# Altium PCB Airbrake Motor Controller.PcbDoc (part 2 of 2)
Units mil, origin at the board's own origin, x right, y up, seen from the top; angles counter-clockwise.
Board outline 2250 x 2250 mil, 4 copper layers (Top Layer, Layer 1, Layer 2, Bottom Layer), stack 23.756 mil thick; 103 components, 85 nets, 338 pads, 160 vias.
Unrouted connection lines stored in the file: 19.
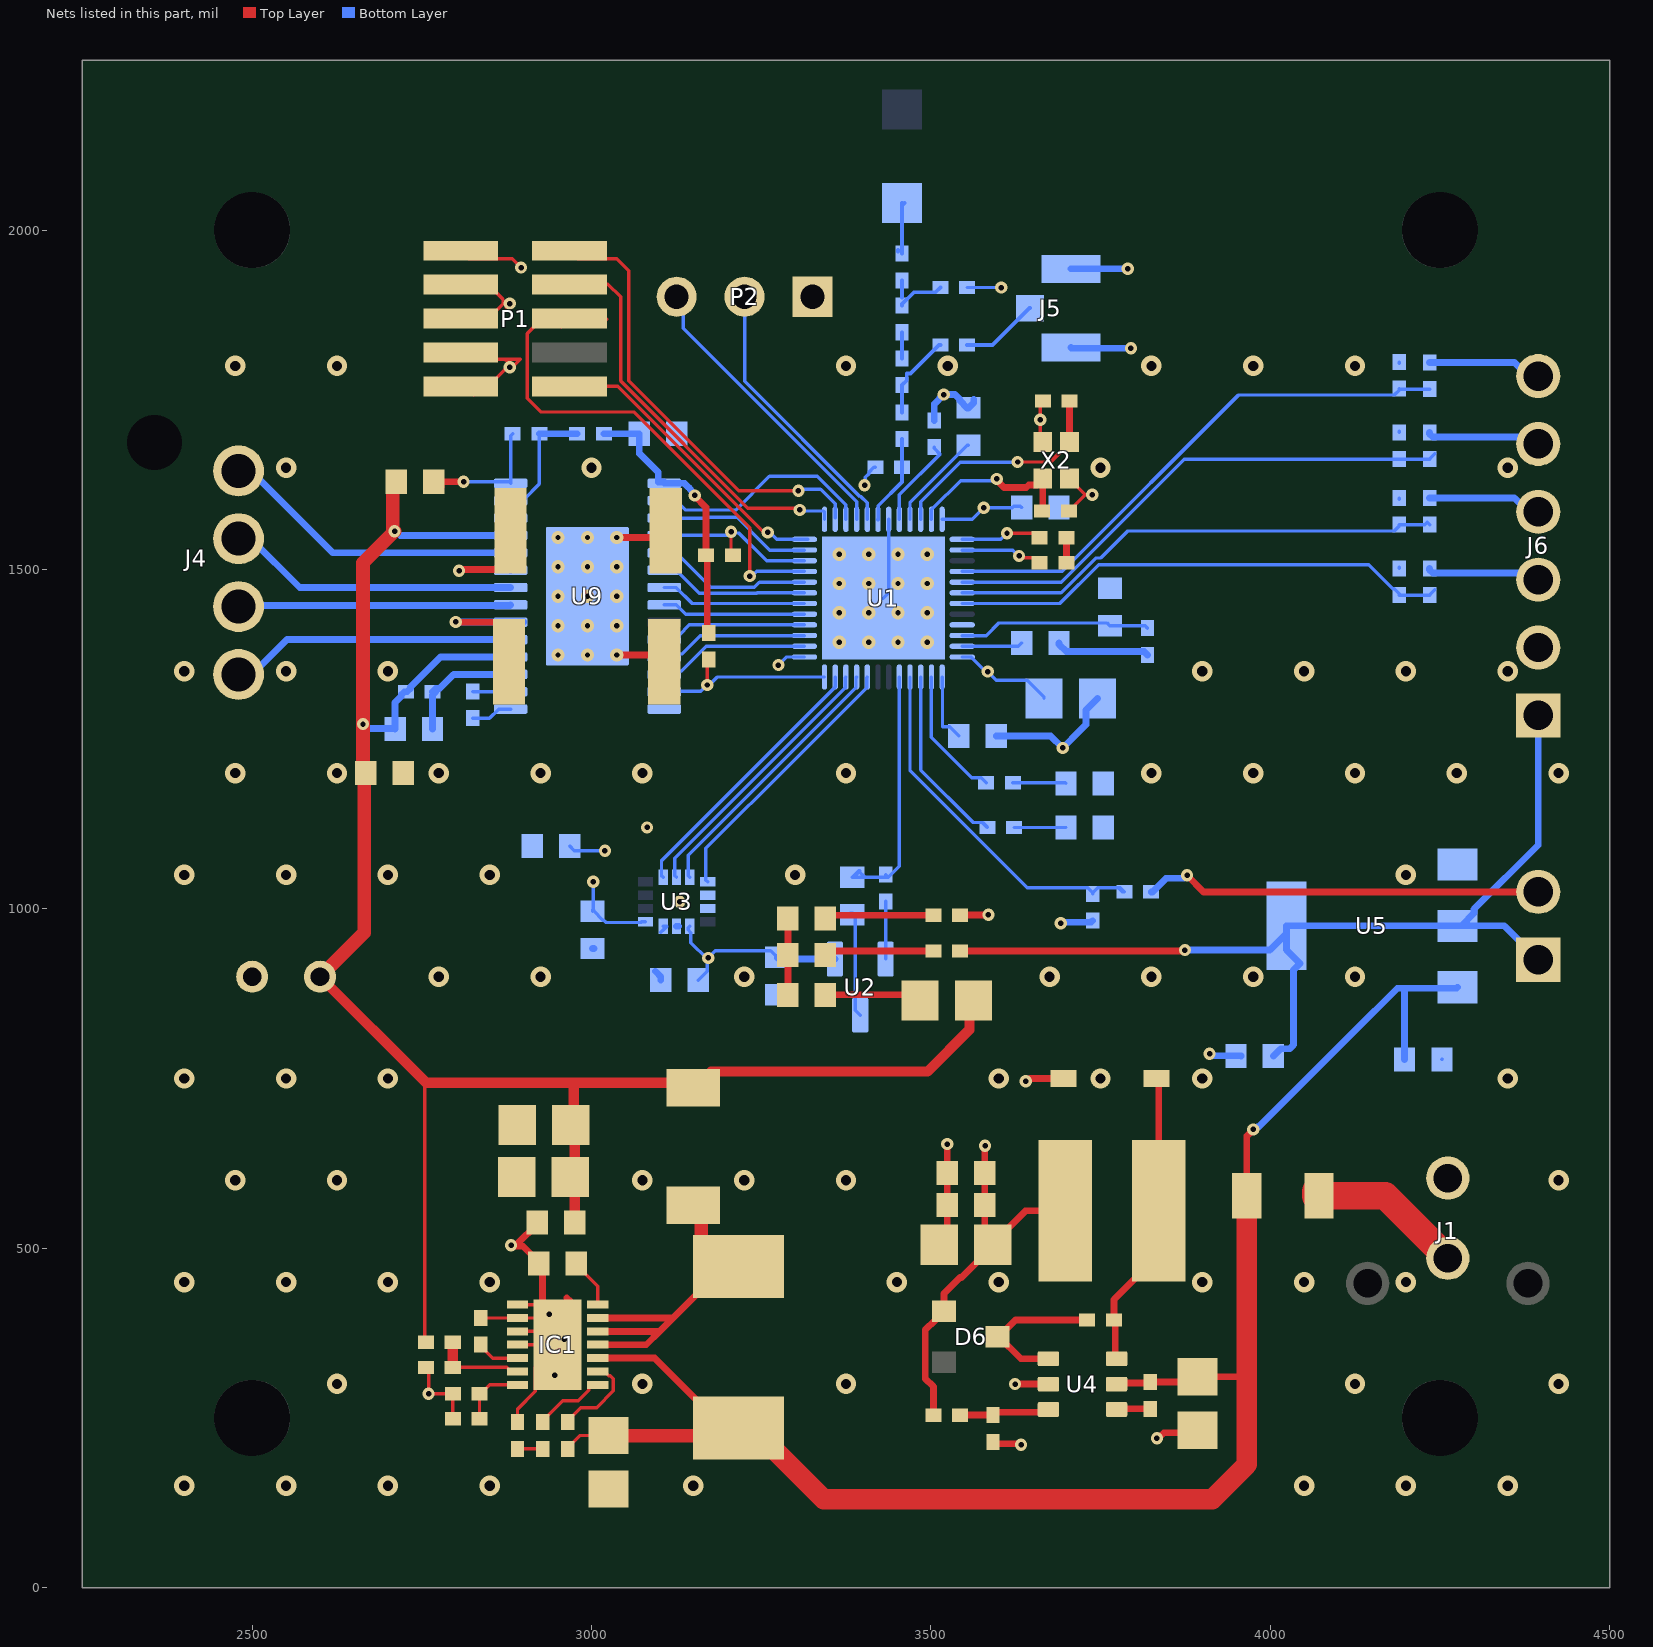
[diagram p4: the nets of this part, all layers, seen from the top]

## Part data
C1 C2 C3 C4 C5 C8 C9 C10 C11 C12 C13 C14 C15 C16 C17 C18 C19 C20 C21 C22 C23 C24 C25 C26 C27 C28 C29 C30 C31 C32 C33 C38 C39 C40 C41 C44 C45: "Capacitor", Publisher="Altium Limited"
  C1 C2 C3 C4 C5 C8 C9 C10 C11 C12 C13 C14 C15 C16 C17 C18 C19 C20 C21 C22 C23 C24 C25 C26 C27 C28 C29 C30 C31 C32 C33 C38 C39 C41 C44 C45: LatestRevisionDate=17-Jul-2002, LatestRevisionNote="Re-released for DXP Platform.", PackageDescription="Radial Cap, Thru-Hole; 2 Leads; 0.3 in Pin Spacing", PackageReference=RAD-0.3, Published=8-Jun-2000
  C40: PackageDescription="Capacitor; 2 Leads", PackageReference=CAPR5-4X5, Published=23-Sep-2002
D1: library part CMP-2000-07170-1, "Schottky Rectifier, 0.5 A, 40 V, 2-Pin SOP (SOD-123), RoHS, Tape and Reel", Diode Case Style=SOD-123, Forward Current If(AV)=500mA, Forward Surge Current Ifsm Max=5.5A, Forward Voltage VF Max=500mV, Manufacturer=STMicroelectronics, Operating Temperature Max=150°C, Package Description="2-Pin Small Outline Diode, Body 2.7 x 1.55 mm", Package Reference=SOD-123-2, Repetitive Reverse Voltage Vrrm Max=40V, Datasheet URL=http://www.st.com/content/ccc/resource/technical/document/datasheet/group1/0f/03/9b/7c/50/58/48/d7/CD00001852/files/CD00001852.pdf/jcr:content/translations/en.CD00001852.pdf, Datasheet Version=01/2002, Diode Configuration=Single, Diode Type=Schottky, Manufacturer URL=http://www.st.com/, Mounting Technology=SurfaceMount, No. of Pins=2Pins, Packaging=CutTape, Product Range=-, SVHC=NoSVHC(15-Jun-2015)
D3: library part CMP-08971-000008-1, "DIODE SCHOTTKY 20V 5A PMDTM", Forward Current=5A, Manufacturer=Rohm, Max Junction Temp=+125°C, Max Repetitive Reverse Voltage=25V, Max Surge Forward Current=100A, Package=PMDTM, Peak Reverse Current=500uA, Reverse Voltage=20V, Temperature="to +125°C", Automotive=No, Category=Diode, ComponentLink2Description=Datasheet, ComponentLink2URL=https://fscdn.rohm.com/en/products/databook/datasheet/discrete/diode/schottky_barrier/rsx501lam20tr-e.pdf, Device Class L1="Discrete Semiconductors", Device Class L2=Diodes, Device Class L3="Schottky Diodes", Digikey Description="DIODE SCHOTTKY 20V 5A PMDTM", Height=1.05mm, Lead Free=Yes, Manufacturer Part Number=RSX501LAM20TR, Octopart=https://octopart.com/rsx501lam20tr-rohm-82270774, RoHS=TRUE, Temperature Range High=+125°C
D6: library part CMP-0303-00002-2, "DIODE SCHOTTKY 30V 200MA SOT23-3", Capacitance=10pF, Forward Current=200mA, Manufacturer="Diodes Inc.", Max Junction Temp=+150°C, Max Repetitive Reverse Voltage=30V, Max Surge Forward Current=600mA, Package=SOT23, Peak Reverse Current=2uA, Temperature="-65°C to +150°C", Temperature Range Low=-65°C, Automotive=No, Automotive Grade=NA, Category=Diode, ComponentLink2Description=Datasheet, ComponentLink2URL=https://www.diodes.com/assets/Datasheets/ds11005.pdf, Device Class L1="Discrete Semiconductors", Device Class L2=Diodes, Device Class L3="Schottky Diodes", Digikey Description="DIODE SCHOTTKY 30V 200MA SOT23-3", Footprint Url=https://www.diodes.com/assets/Package-Files/SOT23.pdf, Height=1.1mm, Lead Free=Yes, Manufacturer Part Number=BAT54-7-F, Mouser Description="Switching diode SOT-23 30 V 200 mA", Octopart=https://octopart.com/bat54-7-f-diodes+inc.-39681803, Reverse Voltage=30V, RoHS=TRUE, Standoff Height=0.013mm, Temperature Range High=+150°C
E1: "Generic Antenna", LatestRevisionDate=17-Jul-2002, LatestRevisionNote="Re-released for DXP Platform.", PackageReference=PIN1, Published=24-Mar-1999, Publisher="Altium Limited"
F1: "Fuse", LatestRevisionDate=17-Jul-2002, LatestRevisionNote="Re-released for DXP Platform.", PackageDescription="Thru-Hole; 2 Leads", PackageReference=PIN-W2/E2.8, Published=8-Jun-2000, Publisher="Altium Limited"
IC1: "Integrated Circuit", Manufacturer_Name="Monolithic Power Systems (MPS)", Mouser Part Number=946-MP3426DL-LF-Z, Datasheet Link=https://www.monolithicpower.com/en/documentview/productdocument/index/version/2/document_type/Datasheet/lang/en/sku/MP3426/, Height=1mm, Manufacturer_Part_Number=MP3426DL-LF-Z, Mouser Price/Stock=https://www.mouser.co.uk/ProductDetail/Monolithic-Power-Systems-MPS/MP3426DL-LF-Z?qs=Z3CaLxJiOJL0MxCuEKYvhQ%3D%3D
J1: "Connector", Manufacturer_Name=Molex, Arrow Part Number=0430450212, Arrow Price/Stock=https://www.arrow.com/en/products/0430450212/molex, Datasheet Link=http://www.molex.com/pdm_docs/sd/430450212_sd.pdf, Manufacturer_Part_Number=0430450212
J2 J6: "Connector", Manufacturer_Name=Molex, Mouser Part Number=N/A, Height=6.99mm
  J2: Arrow Part Number=0705530036, Arrow Price/Stock=https://www.arrow.com/en/products/0705530036/molex, Datasheet Link=https://www.molex.com/pdm_docs/sd/705530036_sd.pdf, Manufacturer_Part_Number=0705530036, Mouser Price/Stock=https://www.mouser.com/Search/Refine.aspx?Keyword=N%2FA
  J6: Arrow Part Number=0705530005, Arrow Price/Stock=https://www.arrow.com/en/products/0705530005/molex, Datasheet Link=https://www.molex.com/pdm_docs/sd/705530005_sd.pdf, Manufacturer_Part_Number=0705530005, Mouser Price/Stock=https://www.mouser.co.uk/ProductDetail/Molex/0705530005?qs=PBcRNPEHKsq8dLeRN2VY7Q%3D%3D
J4: "Connector", Manufacturer_Name="TE Connectivity", Mouser Part Number=571-2-644486-4, Arrow Part Number=2-644486-4, Arrow Price/Stock=https://www.arrow.com/en/products/2-644486-4/te-connectivity, Datasheet Link=http://www.te.com/commerce/DocumentDelivery/DDEController?Action=showdoc&DocId=Customer+Drawing%7F644486%7FL%7Fpdf%7FEnglish%7FENG_CD_644486_L_baseFilename.pdf%7F2-644486-4.pdf, Height=10.668mm, Manufacturer_Part_Number=2-644486-4, Mouser Price/Stock=https://www.mouser.co.uk/ProductDetail/TE-Connectivity-AMP/2-644486-4?qs=8XyASyDp%2FcDn2y5ith8QSA%3D%3D
J5: library part CMP-2000-05152-2, "CONN U.FL RCPT STR 50 OHM SMD", Dielectric Material=Polymer, Frequency=6GHz, Housing Color=Beige, Insulation Resistance=500MR, Max Operating Temperature=90°C, Min Operating Temperature=-40°C, Package Quantity=2500, Body Material=Bronze, Body Plating=Silver, Connector Type=Coaxial, Contact Material=Brass, Contact Plating=Gold, Depth=3.1mm, Fastening Type=Snap, Gender=Male, Impedance=50R, Lead Free="Lead Free", Length=3mm, Max Frequency=6GHz, Mount="Surface Mount", Orientation=Straight, Packaging="Tape and Reel", Radiation Hardening=No, REACH SVHC="No SVHC", Termination=Solder, Wire/Cable Type=Coaxial
L5: library part CMP-0227-00330-1, "SMD Shielded Tiny Power Inductor WE-TPC, L = 4.70 µH", Inductance="4.70 ÂµH", ComponentLink1Description="Manufacturer Link", ComponentLink1URL=http://www.we-online.com, ComponentLink2Description=Datasheet, ComponentLink2URL=http://www.we-online.de/katalog/media/pdf/744042004.pdf, DatasheetVersion="ver 6, Aug-2010", PackageDescription="SMD Inductor, 2-Leads, Body 4.8 x 4.8 mm", PackageReference=WE-TPC-4818-M, PackageVersion=2010
L7: "Inductor", Manufacturer_Name=ABRACON, Mouser Part Number=815-ASPI0630LR4R7T15, Arrow Part Number=ASPI-0630LR-4R7M-T15, Arrow Price/Stock=https://www.arrow.com/en/products/aspi-0630lr-4r7m-t15/abracon, Datasheet Link=http://www.abracon.com/Magnetics/power/ASPI-0630LR.pdf, Manufacturer_Part_Number=ASPI-0630LR-4R7M-T15, Mouser Price/Stock=https://www.mouser.co.uk/ProductDetail/ABRACON/ASPI-0630LR-4R7M-T15?qs=bWAYEm3xoCYVuRmkzS1c6A%3D%3D
P1: library part CMP-2000-05353-1, "Male Header, Pitch 1.27 mm, 2 x 5 Position, Height 6.25 mm", Color=Black, Manufacturer=Samtec, Package Description="Male Header, Pitch 1.27 mm, 2 x 5 Position, Height 5.97 mm, Tail Length 4.32 mm", Package Reference=FTSH-105-01-L-DV-K, Standard Package=1, Category=Connectors,Interconnects, Connector Type=Header,Unshrouded, Contact Finish=Gold, Contact Finish Thickness=10µin(0.25µm), Contact Mating Length="0.120\"(3.05mm)", Contact Type=MalePin, Datasheet URL=http://suddendocs.samtec.com/prints/ftsh-1xx-xx-xxx-dv-xxx-mkt.pdf, Datasheet Version="Rev. ET, 10/1995", Family=RectangularConnectors-Headers,MalePins, Manufacturer URL=http://www.samtec.com/, Mating Products="SFMC-105-L2-S-D-TR-ND / -CONN.05\"SURFACE10POSSMT / FLE-105-01-G-DV-TR-ND / -CONNSKT1.27MM10POSDUALSMD / FLE-105-01-G-DV-A-P-ND / -CONNSKT1.27MM10POSDUALSMD / FLE-105-01-G-DV-A-ND / -CONNSKT1.27MM10POSDUALSMD / CLP-105-02-G-D-P-TR-ND / -CONNRCPT10POSDUAL.05\"SMD / SAM1155-05-ND / -CONNRCPT10POSDUAL.05\"SMD / SAM1154-05-ND / -CONNRCPT10POSDUAL.05\"SMD / SAM1153-05-ND / -CONNRCPT10POSDUAL.05\"SMD / SAM1226-05-ND / -CONNRCPT.05\"10POSDUALSMD", Mounting Type=SurfaceMount, Number of Positions=10, Number of Positions Loaded=All, Number of Rows=2, Other Names=Q3937619, Package URL=http://suddendocs.samtec.com/prints/ftsh-1xx-xx-xxx-dv-xxx-footprint.pdf, Packaging=Tube, Pitch="0.050\"(1.27mm)", Product Training Modules=Board-to-BoardConnectors, Row Spacing="0.050\"(1.27mm)", Series=FTSH, Termination=Solder
P2: "Header, 3-Pin", LatestRevisionDate=17-Jul-2002, LatestRevisionNote="Re-released for DXP Platform.", Publisher="Altium Limited"
R1 R2 R3 R4 R5 R6 R7 R8 R9 R10 R11 R12 R13 R14 R15 R16 R17 R18 R19 R20 R21 R22 R23 R24 R25 R26 R27 R28 R29 R30 R31 R32 R33 R34: "Resistor", LatestRevisionDate=17-Jul-2002, LatestRevisionNote="Re-released for DXP Platform.", PackageDescription="Axial Device, Thru-Hole; 2 Leads; 0.3 in Pin Spacing", PackageReference=AXIAL-0.3, Published=8-Jun-2000, Publisher="Altium Limited"
U1: library part CMP-2100-03661-1, "Multiprotocol Bluetooth Smart, ANT/ANT+ and Proprietary System-on-Chip, 2.4 GHz, 256 KB FLASH, 1.7 to 3.6 V, -40 to 85 degC, 48-Pin QFN, RoHS, Tape and Reel", Frequency=2.4GHz, Manufacturer="Nordic Semiconductor", Max Operating Temperature=85degC, Min Operating Temperature=-40degC, Package Description="48-Pin Quad Flat No-lead Package, Body 6 x 6 mm, Pitch 0.4 mm, Thermal Pad 4.6 x 4.6 mm", Package Reference=QF-48, Datasheet URL=http://infocenter.nordicsemi.com/pdf/nRF52832_PS_v1.0.pdf, Datasheet Version="Rev. 1.0, 02/2016", Lead Free=LeadFree, Manufacturer URL=http://www.nordicsemi.com/eng/Products/, Max Frequency=2.4GHz, Mount=SurfaceMount, Packaging=TapeandReel, RoHSCompliant=true
U2: library part CMP-04948-000003-1, "LOW-POWER HIGH-ACCURACY ANALOG O", Ambient Temperature Range High=+150°C, Ambient Temperature Range Low=-40°C, Manufacturer="Texas Instruments", Manufacturer Part Number=TMP235A2DBZR, Max Supply Voltage=5.5V, Min Supply Voltage=2.3V, Operating Supply Current=9uA, Output Current=500uA, Package=DBZ0003A, Temperature="-40°C to +150°C", Accuracy=0.5%, Automotive=No, Category=IC, ComponentLink2Description=Datasheet, ComponentLink2URL=http://www.ti.com/lit/ds/symlink/tmp235.pdf, Device Class L1=Sensors, Device Class L2="Temperature and Humidity Sensors", Device Class L3=unset, Digikey Description="LOW-POWER HIGH-ACCURACY ANALOG O", Height=1.12mm, Lead Free=Yes, Max Junction Temp=+150°C, Mouser Description="±2°C Analog output temperature sensor, with 10mV /°C gain 3-SOT-23 -40 to 150", Octopart=https://octopart.com/tmp235a2dbzr-texas+instruments-94966376, RoHS=TRUE, Sensor Output="Analog Voltage", Standoff Height=0.01mm, Temperature Range High=+150°C, Temperature Range Low=-40°C
U3: library part CMP-12177-000008-1, "IMU ACCEL/GYRO I2C/SPI 14LGA", Manufacturer=STMicroelectronics, Max Supply Voltage=3.6V, Min Supply Voltage=1.62V, Operating Supply Current=0.29-0.65mA, Package=LGA-14L-DM00249496, Temperature="-40°C to +85°C", Temperature Range High=+85°C, Temperature Range Low=-40°C, Accel Range=2/4/8/16g, Automotive=No, Category=IC, ComponentLink2Description=Datasheet, ComponentLink2URL=https://www.st.com/resource/en/datasheet/lsm6dsm.pdf, Device Class L1=Sensors, Device Class L2="Motion Sensors", Device Class L3="Inertial Measurement Units (IMUs)", Digikey Description="IMU ACCEL/GYRO I2C/SPI 14LGA", Footprint Url=https://www.st.com/content/ccc/resource/technical/document/technical_note/73/17/9c/16/dd/96/4a/01/CD00134799.pdf/files/CD00134799.pdf/jcr:content/translations/en.CD00134799.pdf, Gyro Range=125/250/500/1000/2000°/s, Height=0.86mm, Lead Free=Yes, Manufacturer Part Number=LSM6DSMTR, Mouser Description="LSM6DSM Series 3.6 V I2C/SPI 3D Accelerometer and 3D Gyroscope - LGA-14", Octopart=https://octopart.com/lsm6dsmtr-stmicroelectronics-66358194, Resolution=16bits, RoHS=TRUE, Sensor Output=I2C,SPI, Sensor Type=Temperature,Accelerometer,Gyroscope
U4: library part CMP-0069-01211-3, "750mA Load Step-Down DC-DC Regulator, 6-pin Tiny SOT23, Pb-Free", Manufacturer="Texas Instruments", PackageTopMarking=SHAB*XTT, PowerWise=N, Code_IPC=SOT26A-6, Code_JEDEC=MO-193-AA, ComponentLink1Description="Datasheet URL", ComponentLink1URL=http://www.ti.com/general/docs/lit/getliterature.tsp?genericPartNumber=LM2736&fileType=pdf, CompType=Switcher, PackageDescription="Molded TSOT, 2.97 x 1.65 x 0.87mm Body, 6 Lead, 0.95mm Pitch", PackageReference=DDC0006A, PinCount=6, RoHS=Y
U5: library part CMP-12153-000005-1, "IC REG LINEAR 5V 1.2A SOT223", Dropout Voltage=350mV, Manufacturer=STMicroelectronics, Max Junction Temp=+150°C, Max Supply Voltage=18V, Min Supply Voltage=2.6V, Nominal Supply Current=250uA, Output Current=2A, Output Voltage=5V, Package=SOT-223-0046067_14, Temperature="-40°C to +125°C", Temperature Range High=+125°C, Temperature Range Low=-40°C, Accuracy Percentage=2%, Automotive=No, Category=IC, ComponentLink2Description=Datasheet, ComponentLink2URL=https://www.st.com/content/ccc/resource/technical/document/datasheet/group3/0e/5a/00/ca/10/1a/4f/a5/DM00366442/files/DM00366442.pdf/jcr:content/translations/en.DM00366442.pdf, Device Class L1="Integrated Circuits (ICs)", Device Class L2="Power Management ICs", Device Class L3="Voltage Regulators - Linear", Digikey Description="IC REG LINEAR 5V 1.2A SOT223", Height=1.9mm, Lead Free=Yes, Manufacturer Part Number=LDL1117S50R, Mouser Description="LDL1117 Series 1.2 A 5 V High PSRR LDO Linear Voltage Regulator - SOT-223", Number of Outputs=1, Octopart=https://octopart.com/ldl1117s50r-stmicroelectronics-81876164, Output Type=Fixed, RoHS=TRUE, Standoff Height=0.02mm
U9: library part CMP-1685-00019-1, "Stepper Motor Controller IC, 8.2 to 45 V, -40 to 85 degC, 28-Pin HTSSOP (PWP), Green (RoHS & no Sb/Br), Tube", Capacitance="47 uF", Case\Package=Radial, Max Operating Temperature="85 degC", Min Operating Temperature="-40 degC", Package Quantity=200, Tolerance=20%, Voltage Rating="100 V", ComponentLink1Description="Manufacturer URL", ComponentLink1URL=http://www.ti.com/, ComponentLink2Description=Datasheet, ComponentLink2URL=http://www.ti.com/general/docs/lit/getliterature.tsp?genericPartNumber=DRV8825&fileType=pdf, DatasheetVersion="SLVSA73F, 07/2014", Diameter="8 mm", Height="11.5 mm", Lead Pitch="3.5 mm", Length="11.5 mm", Mount="Through Hole", PackageDescription="28-Pin Small Outline Package Integrated Circuit, Body 9.7 x 4.4 mm, Pitch 0.65 mm", PackageReference=PWP0028C, Packaging=Bulk, Pins=2, Radiation Hardening=No, REACH SVHC="No SVHC", RoHSCompliant=true, Voltage Rating (DC)="100 V", Width="8 mm"
X2: "32MHz Crystal Oscillator", Supplier Part Number 1=490-17328-1-ND, Supplier 1=Digi-Key
D2 D4 D5 D7 D8: LatestRevisionDate=08-Jul-2005, LatestRevisionNote="Mech Layer 1 removed.", PackageDescription="LED; 2 Leads", PackageReference=LED-0, Published=8-Jun-2000, Publisher="Altium Limited"
L1 L2 L3 L4 L6: Code_IEC=1005, Code_JEITA=0402, LatestRevisionDate=29-May-2009, LatestRevisionNote="IPC-7351 Footprint Added.", PackageDescription="Chip Inductor", PackageReference=0402-A, Published=8-Jun-2000, Publisher="Altium Limited"

## Free pads (board coordinates)
  round 112 hole 112 unplated: 6(2500,250) 6(2500,2000) 6(4250,250) 6(4250,2000)

## Via types
v1: diameter 30, hole 15, Top Layer to Bottom Layer, tented both sides, 77 vias
v2: diameter 18, hole 8, Top Layer to Bottom Layer, tented both sides, 52 vias
v3: diameter 19.68, hole 7.87, Top Layer to Bottom Layer, tented both sides, 31 vias

## Nets (pads, with @x,y where several pads share a name; then routed paths per layer and width w, separated by ;. In a path a pad name is that pad's centre, name@x,y a point inside that pad or via, vN(x,y) a via of type N, cw(c..) or ccw(c..) an arc to the next point about the centre after c; other vN are vias at no path point)
3V3: C10.1 C15.1 C16.1 C18.1 C19.2 C20.2 C25.2 C26.2 C27.2 D6.1 L5.2 P1.1 R15.1 R21.2 U1.13 U1.36 U1.48 U2.1 U3.5 U3.8 | length 1516
  Top Layer w5: P1.1@2807.34,1969.8 2819.4,1957.73 2883.28,1957.73 v2(2896.21,1944.8)
  Top Layer w10: R15.1@3503.87,254.04 3503.87,295.97 3491.65,308.19 3491.65,379.28 3506.65,394.28 3506.65,396.24 3517.39,406.99 D6.1@3519.36,406.99 3519.36,433.19 3543.01,456.84 3544.98,456.84 3591.18,503.04 C26.2@3591.18,505.01 ; R21.2@3543.12,990.47 3543.59,990.94 3584.32,990.94 v2(3584.79,991.41) ; v2@3579.37,653.43 C27.2@3579.37,610.82 C25.2@3579.37,563.37 3579.37,516.82 C26.2@3591.18,505.01 ; L5.2@3697.87,555 3639.2,555 3591.18,506.98 C26.2@3591.18,505.01
  Bottom Layer w5: C10.1@2967.71,1092.58 2974.62,1085.67 v2(3019.72,1085.67) ; C19.2@3001.55,996.64 C19.2@3001.55,998.99 ; v2(3002.53,1039.94) 3002.53,998.99 3003.22,998.31 3003.22,996.93 3016.76,983.39 3018.14,983.39 3021.66,979.86 3072.7,979.86 3073.71,980.88 U3.8@3079.55,980.88 ; U3.5@3145,974.48 3142.54,972.02 3142.54,969.08 3146.54,965.08 3146.54,950.26 v2@3170.55,926.24 ; C20.2@3157.3,895 3170.55,908.25 v2@3170.55,926.24 ; C18.1@3273.61,928.46 3263.79,938.28 3182.59,938.28 v2@3170.55,926.24 ; v2(3275.47,1359.16) 3287.45,1371.14 U1.13@3313.86,1371.14 ; U1.36@3516.61,1573.89 3561.05,1573.89 v2(3578.06,1590.91) 3619.96,1590.91 3622.15,1593.09 3631.99,1593.09 C15.1@3633.74,1591.33 ; U1.48@3546.14,1371.14 3559.1,1371.14 v2@3582.24,1347.99 ; v2@3585.29,1347.99 3596.25,1337.03 3641.73,1337.03 3666.79,1311.97 C16.1@3666.79,1310
  Bottom Layer w10: C18.1@3273.61,928.46 3276.06,926.01 U2.1@3358.59,926.01
  other v2: 3579.86,650.98 3172.05,927.71 3583.76,1349.52
5V0: C33.2 J2.1 J6.1 R11.2 U5.2 U5.4 | length 1473.3
  Top Layer w10: R11.2@3543.12,937.82 v2@3872.63,937.82
  Bottom Layer w10: v2(3874.34,939.29) 3999.49,939.29 4024.02,963.82 U5.4@4024.02,975 ; C33.2@4004.72,783 4015.47,793.77 4028.63,793.77 4034.49,799.63 4034.49,910.04 4044.02,919.57 4024.02,939.57 U5.4@4024.02,975 ; J2.1@4395,925 4345,975 U5.2@4281.89,975 ; J6.1@4395,1285 4395,1094.02 4300.51,999.53 4300.51,993.62 U5.2@4281.89,975 ; U5.4@4024.02,975 U5.2@4275.98,975 U5.2@4281.89,975
7V4: C2.2 C21.2 C32.2 F1.1 IC1.3 L7.1 R13.2 R17.2 U4.5 U5.3 | length 2514
  Top Layer w5: R17.2@2965,204.25 2965,206.22 2982.72,223.94 C2.2@3024.8,223.94
  Top Layer w10: IC1.3@3009.96,337.15 3010.87,338.06 3093.09,338.06 3196.14,235 L7.1@3216.81,235 ; U4.5@3773.66,299.71 3775.14,301.19 3821.77,301.19 R13.2@3823.25,302.66 3884.92,302.66 C21.2@3892.8,310.54 3965.63,310.54 ; F1.1@3965.63,577.35 3965.63,665.14 3975,674.51 v2(3975,675)
  Top Layer w20: C2.2@3024.8,223.94 3205.75,223.94 L7.1@3216.81,235
  Top Layer w30: L7.1@3216.81,235 3237.48,235 3342.48,130 3914.41,130 3965.63,181.22 3965.63,308.59 ; 3965.63,310.54 F1.1@3965.63,577.35
  Bottom Layer w10: v2(3975,675) 3977.16,675 3981.16,679 3983.37,679 4122.95,818.58 4187.34,882.96 4197.96,882.96 ; C32.2@4197.96,778 4197.96,882.96 ; U5.3@4275.98,884.45 4274.5,882.96 4197.96,882.96
12V0: C29.2 C30.2 C31.2 C39.1 C40.1 C41.2 C44.2 D3.1 R18.2 R20.2 R26.1 U9.4 U9.11 | length 2951.3
  Top Layer w5: 2754.22,745.78 2754.22,363.4 R18.2@2756.19,361.43
  Top Layer w15: C40.1@2600,900 2754.22,745.78 2756.19,743.81 2973.83,743.81 ; C29.2@2968.74,605 2975.32,598.42 2975.32,544.82 2977.94,542.21 2977.94,540.24 C31.2@2975.32,537.62 ; C29.2@2975.32,605 2975.32,674.04 2968.74,680.62 2968.74,681.34 2973.83,686.43 2973.83,743.81 ; D3.1@3145,729.12 3130.31,743.81 2973.83,743.81 ; D3.1@3150,724.12 3150,734.12 3176,760.12 3495.12,760.12 3556.75,821.75 3556.75,858.93 R20.2@3562.81,864.99
  Top Layer w20: C40.1@2600,900 2665,965 2665,1197.7 C44.2@2667.3,1200 2663.31,1203.99 v2(2663.31,1272.27) 2663.31,1504.75 ; 2663.31,1509.75 v2(2709.88,1556.32) ; v2@2707.42,1558.78 2707.42,1624.24 C41.2@2712.44,1629.26
  Bottom Layer w10: v2(2663.31,1272.27) 2665.48,1272.27 2671.89,1265.86 2709.9,1265.86 C39.1@2710.61,1265.15 2710.61,1304.12 2719.55,1313.06 2719.55,1315.03 2724.39,1319.87 R26.1@2726.36,1319.87 2728.33,1319.87 2733.17,1324.71 2733.17,1326.68 2777.54,1371.05 U9.4@2880.83,1371.05 ; v2(2709.88,1556.32) 2712.05,1556.32 2718.18,1550.19 U9.11@2880.83,1550.19
CP2: C38.2 U9.2 | length 56
  Bottom Layer w5: C38.2@2825,1320.27 2825.4,1319.87 U9.2@2880.83,1319.87
DCC: L4.2 U1.47 | length 89.6
  Bottom Layer w5: U1.47@3546.14,1386.89 3628.87,1386.89 L4.2@3633.74,1391.76
DEC2: C14.1 U1.32 | length 134.7
  Bottom Layer w5: U1.32@3453.62,1573.89 3453.62,1610.04 3513.53,1669.95 3505.13,1678.35 C14.1@3505.13,1680.32
DEC3: C13.1 U1.33 | length 145.8
  Bottom Layer w5: U1.33@3469.37,1573.89 3469.37,1598.88 3553.43,1682.94 C13.1@3555.39,1682.94
EA+: J6.3 R2.2 | length 168
  Bottom Layer w10: R2.2@4234.93,1501.46 4234.93,1499.49 4239.77,1494.65 4385.35,1494.65 J6.3@4395,1485
EA-: J6.4 R6.2 | length 168.5
  Bottom Layer w10: R6.2@4234.93,1605.4 4359.73,1605.4 4380.13,1585 J6.4@4395,1585
EB+: J6.5 R3.2 | length 168.2
  Bottom Layer w10: R3.2@4234.93,1701.93 4234.93,1699.96 4239.77,1695.12 4384.88,1695.12 J6.5@4395,1685
EB-: J6.6 R7.2 | length 168.3
  Bottom Layer w10: R7.2@4234.93,1804.98 4360.15,1804.98 4380.13,1785 J6.6@4395,1785
GND: C2.1 C3.1 C4.1 C5.2 C8.1 C9.2 C10.2 C11.1 C12.1 C13.2 C14.2 C15.2 C16.2 C17.2 C18.2 C19.1 C20.1 C21.1 C23.2 C24.1 C25.1 C26.1 C27.1 C28.1 C29.1 C30.1 C31.1 C32.1 C33.1 C40.2 C41.1 C44.1 C45.1 D1.1 D2.2 D4.2 D5.2 D7.2 D8.2 IC1.8 IC1.9 IC1.10 IC1.11 IC1.15 J1.1 J5.2 J5.3 J6.2 L2.1 P1.3 P1.5 P1.7 P1.9 P2.1 R4.2 R5.2 R8.2 R9.2 R14.1 R16.1 R19.1 R22.1 R23.1 R25.2 R28.2 R34.1 U1.31 U1.45 U1.49 U2.3 U3.2 U3.3 U3.6 U3.7 U4.2 U5.1 U9.14 U9.28 U9.29 X2.2 X2.4 | length 3205.4
  Top Layer w5: R19.1@2756.19,324.28 2759.92,320.55 v2(2759.92,285.59) R14.1@2795.67,285.59 R34.1@2795.67,248.46 ; P1.7@2807.34,1819.8 P1.7@2859.76,1810.75 ; P1.5@2816.58,1879.04 P1.5@2807.34,1869.8 2847.69,1869.8 2869.68,1891.79 ; P1.9@2825.06,1758.71 P1.9@2807.34,1769.8 ; C24.1@2837.01,397.11 IC1.9@2890.94,397.11 2917.07,397.11 2950,364.18 IC1.15@2950,357.74 ; P1.3@2847.69,1919.8 2869.68,1897.81 2869.68,1891.79 ; P1.9@2859.76,1770.59 P1.9@2857.35,1762.32 ; P1.7@2860.83,1809.8 2872.34,1809.8 ; v2@2874.1,1886.31 v2(2879.58,1891.79) 2869.68,1891.79 ; v2@2877.09,1805.04 2872.34,1809.8 ; C23.2@2890.94,243.62 2890.94,262.93 2917.07,289.06 2917.07,324.81 IC1.15@2950,357.74 ; IC1.11@2890.94,357.74 IC1.15@2950,357.74 ; IC1.10@2890.94,377.43 2930.31,377.43 IC1.15@2950,357.74 ; IC1.8@2890.94,416.8 2921.28,416.8 IC1.15@2928,423.51 ; D4.2@3289.36,985.99 D4.2@3289.36,987.96 ; X2.4@3665.04,1690.84 3661.3,1694.58 3661.3,1744.51 C12.1@3665.04,1748.24 ; C11.1@3703.27,1586.13 3705.24,1586.13 3712.58,1593.48 3712.58,1595.45 3725.87,1608.73 ; X2.2@3704.41,1634.37 3704.41,1633.39 3727.77,1610.03 v2(3737.89,1610.03) ; P1.9@2807.34,1769.8 2847.69,1769.8 2873.25,1795.36 2877.09,1795.36 v2(2879.58,1797.85) 2883.1,1797.85 2895.05,1809.8 ; P1.9@2807.34,1769.8 P1.9@2826.62,1757.73 ; P1.9@2826.62,1757.73 P1.9@2857.35,1762.32 ; P1.9@2826.62,1757.73 P1.9@2857.35,1762.32 ; 2872.34,1809.8 2895.05,1809.8 ; 2872.34,1809.8 2895.05,1809.8
  Top Layer w10: C41.1@2778.21,1621.11 2778.21,1629.16 2778.31,1629.26 v2(2811.51,1629.26) ; C29.1@2890,605 C29.1@2890,606.97 ; C30.1@2890.43,679.81 C30.1@2890.43,681.78 ; C31.1@2920.2,537.62 2920.2,535.65 2890.43,505.89 2883.11,505.89 v2(2881.58,504.35) 2883.11,502.82 2899.04,502.82 2922.44,479.43 C28.1@2922.44,477.46 2928,471.9 2928,439.84 IC1.15@2928,423.51 ; 2963.52,426.64 IC1.15@2968.95,421.21 ; IC1.15@2975.76,377.43 IC1.15@2975.76,404.87 ; v3(3037.33,1374) 3097.37,1374 R22.1@3107.21,1364.16 ; v3(3037.33,1547.23) 3099.55,1547.23 R23.1@3109.4,1557.08 ; D2.2@3289.36,873.35 D5.2@3289.36,931.92 D4.2@3289.36,985.99 ; C26.1@3512.44,505.01 3524.25,516.82 C25.1@3524.25,563.37 C27.1@3524.25,610.82 v2(3524.25,653.43) ; R16.1@3591.57,214.67 3594.29,211.95 3631.38,211.95 v2(3632.91,210.42) ; v2(3624.21,299.71) U4.2@3673.27,299.71 ; v2(3639.86,745.98) 3642.03,745.98 3646.05,750 D1.1@3695.3,750 ; C9.2@3699.69,1509.93 C5.2@3699.69,1546.61 ; v2(3833.09,220) 3835.26,220 3843.29,228.04 3885.1,228.04 C21.1@3892.8,235.73
  Bottom Layer w5: v2@2805,1631.56 2807.3,1629.26 2878.53,1629.26 U9.14@2880.83,1626.96 2880.83,1697.08 R25.2@2883.75,1700 ; U3.7@3102.19,965.66 3104.38,967.85 3104.65,967.85 3111.27,974.48 U3.7@3105.63,974.48 ; C17.2@3384.19,991.38 3388.69,986.87 3388.69,850.64 U2.3@3396,843.34 ; v2@3403.59,1628.98 3403.59,1635.95 3408.88,1641.23 3408.88,1643.2 3416.22,1650.54 C3.1@3418.19,1650.54 ; U1.49@3430,1457.75 3437.87,1465.63 U1.31@3437.87,1573.89 ; L2.1@3553.43,1915.43 v2(3603.65,1915.43) ; R4.2@4190,1501.46 R4.2@4190,1503.43 ; R8.2@4190,1603.43 R8.2@4190,1605.4 ; R5.2@4190,1701.93 R5.2@4190,1703.9 ; R9.2@4190,1803.8 R9.2@4190,1805.76 ; C32.1@4253.08,778 C32.1@4253.81,778.72
  Bottom Layer w10: C19.1@3001.55,941.52 C19.1@3003.52,941.52 ; C20.1@3093.99,908.07 3102.19,899.88 C20.1@3102.19,895 ; U3.6@3125.31,974.48 U3.6@3128.11,974.48 ; C17.2@3382.22,991.38 C17.2@3384.19,991.38 ; C14.2@3505.13,1719.69 3505.13,1743.96 v2(3518.91,1757.74) 3535.71,1757.74 3542.68,1750.77 3542.68,1748.81 3553.43,1738.06 C13.2@3555.39,1738.06 3563.28,1745.94 C13.2@3563.28,1750.79 ; C4.1@3596.25,1254.78 3676.64,1254.78 v2(3694.35,1237.06) 3719.08,1261.79 3728.62,1271.33 3728.62,1293.09 C16.2@3745.53,1310 ; v2(3691.4,978.7) 3692.93,980.23 3736.1,980.23 R28.2@3738.47,982.6 ; J5.3@3706.38,1826.93 3707.33,1825.98 v2(3794.86,1825.98) ; J5.2@3706.38,1943.07 v2(3790,1943.07) ; v2(3910.72,786.58) 3912.89,786.58 3915.98,783.48 3956.99,783.48 C33.1@3957.48,783
  other v1: 2400,150 2550,150 2700,150 2850,150 3150,150 4050,150 4200,150 4350,150 2625,300 3075,300 3375,300 4125,300 4425,300 2400,450 2550,450 2700,450 2850,450 3450,450 3600,450 3900,450 4050,450 4200,450 2475,600 2625,600 3075,600 3225,600 3375,600 4425,600 2400,750 2550,750 2700,750 3600,750 3750,750 3900,750 4350,750 2775,900 2925,900 3225,900 3675,900 3825,900 3975,900 4125,900 2400,1050 2550,1050 2700,1050 2850,1050 3300,1050 4200,1050 2475,1200 2625,1200 2775,1200 2925,1200 3075,1200 3375,1200 3825,1200 3975,1200 4125,1200 4275,1200 4425,1200 2400,1350 2550,1350 2700,1350 3900,1350 4050,1350 4200,1350 4350,1350 2550,1650 3000,1650 3750,1650 4350,1650 2475,1800 2625,1800 3375,1800 3525,1800 3825,1800 3975,1800 4125,1800
  other v2: 2946.08,312.5 2959.86,365.65 2937.86,402.44 3129.75,1010.4 3081.93,1120 3402.42,1624.07 3661.3,1720.5
  other v3: 2950.71,1374 2994.02,1374 3365.04,1392.79 3408.35,1392.79 3451.65,1392.79 3494.96,1392.79 2950.71,1417.31 2994.02,1417.31 3037.33,1417.31 3365.04,1436.1 3408.35,1436.1 3451.65,1436.1 3494.96,1436.1 2950.71,1460.62 2994.02,1460.62 3037.33,1460.62 3365.04,1479.41 3408.35,1479.41 3451.65,1479.41 3494.96,1479.41 2950.71,1503.93 2994.02,1503.93 3037.33,1503.93 3365.04,1522.71 3408.35,1522.71 3451.65,1522.71 3494.96,1522.71 2950.71,1547.23 2994.02,1547.23
NetC1_1: C1.1 L2.2 L6.2 | length 93.6
  Bottom Layer w5.78: C1.1@3457.56,1888.94 3457.56,1890.91 3475.13,1908.48 3507.1,1908.48 L2.2@3514.05,1915.43 ; 3457.56,1901.06 L6.2@3457.56,1925.99
NetC1_2: C1.2 R32.2 | length 38.5
  Bottom Layer w5.78: R32.2@3457.56,1811.08 C1.2@3457.56,1849.57
NetC3_2: C3.2 L1.1 U1.30 | length 132.9
  Bottom Layer w5.78: U1.30@3422.13,1573.89 3422.53,1574.29 3422.53,1593.95 3457.56,1628.98 C3.2@3457.56,1650.54 L1.1@3457.56,1692.13
NetC4_2: C4.2 U1.1 | length 103.3
  Bottom Layer w5: U1.1@3516.61,1341.61 3516.61,1326.07 3517.19,1325.5 3517.19,1268.03 3527.89,1268.03 C4.2@3541.14,1254.78
NetC5_1: C5.1 U1.37 | length 120.8
  Top Layer w5: v2(3612.21,1553.5) 3653.43,1553.5 C5.1@3660.32,1546.61
  Bottom Layer w5: U1.37@3546.14,1544.37 3602.78,1544.37 3611.91,1553.5 v2(3612.21,1553.5)
NetC8_2: C8.2 L3.1 U1.46 | length 283.9
  Bottom Layer w5: U1.46@3546.14,1402.63 3581.62,1402.63 3600.15,1421.17 3759.62,1421.17 C8.2@3763.78,1417.01 3815.77,1417.01 L3.1@3819.24,1413.54
NetC9_1: C9.1 U1.38 | length 121.9
  Top Layer w5: v2(3630,1520) 3633.52,1520 3636.24,1517.28 3652.98,1517.28 C9.1@3660.32,1509.93
  Bottom Layer w5: U1.38@3546.14,1528.62 3546.44,1528.32 3620.57,1528.32 3628.89,1520 v2(3630,1520)
NetC17_1: C17.1 R10.2 U1.5 | length 401.3
  Bottom Layer w5: C17.1@3395.61,1055.95 C17.1@3393.64,1055.95 ; R10.2@3433.4,1050.43 R10.2@3437.34,1046.5 ; U1.5@3453.62,1341.61 3453.62,1062.78 R10.2@3437.34,1046.5 ; C17.1@3386.15,1046.5 3403.1,1046.5 ; C17.1@3386.15,1046.5 C17.1@3394.63,1054.97 ; C17.1@3386.15,1046.5 C17.1@3384.19,1046.5 C17.1@3393.64,1055.95 ; C17.1@3393.64,1055.95 C17.1@3394.63,1054.97 ; C17.1@3394.63,1054.97 3403.1,1046.5 ; 3403.1,1046.5 3424.85,1046.5 R10.2@3437.34,1046.5
NetC22_1: C22.1 D1.2 L5.1 U4.6 | length 443.3
  Top Layer w10: U4.6@3773.66,337.11 3773.66,340.95 3771.67,342.94 3771.67,392.25 C22.1@3769.68,394.24 3769.68,424.06 3835.67,490.04 3835.67,746.64 D1.2@3832.31,750
NetC22_2: C22.2 D6.3 U4.1 | length 230.5
  Top Layer w10: D6.3@3598.1,369.59 3600.07,369.59 3624.72,394.24 C22.2@3730.31,394.24 ; D6.3@3599.09,370.58 3632.55,337.11 U4.1@3673.27,337.11
NetC23_1: C23.1 R12.1 | length 37.1
  Top Layer w5: C23.1@2890.94,204.25 R12.1@2928,204.25
NetC24_2: C24.2 IC1.12 | length 63.2
  Top Layer w5: C24.2@2837.01,357.74 2837.01,355.77 2854.72,338.06 IC1.12@2890.94,338.06
NetC28_2: C28.2 IC1.7 | length 73.7
  Top Layer w5: C28.2@2977.56,477.46 2977.56,475.49 3009.05,443.99 IC1.7@3009.05,416.8
NetC38_1: C38.1 U9.1 | length 61.4
  Bottom Layer w5: C38.1@2825,1280.9 2849.73,1280.9 2863.11,1294.28 U9.1@2880.83,1294.28
NetC39_2: C39.2 R26.2 U9.3 | length 182.4
  Bottom Layer w10: C39.2@2765.73,1265.15 2765.73,1315.03 R26.2@2770.57,1319.87 ; R26.2@2765.73,1319.87 2770.57,1324.71 2776.22,1324.71 2796.97,1345.46 U9.3@2880.83,1345.46
NetD2_1: D2.1 R20.1 | length 143.1
  Top Layer w10: D2.1@3344.48,873.35 3475.71,873.35 R20.1@3484.07,864.99
NetD3_2: D3.2 IC1.4 IC1.5 IC1.6 L7.2 | length 567.6
  Top Layer w10: IC1.4@3009.05,357.74 3080.69,357.74 3100.38,377.43 ; IC1.5@3009.05,377.43 3100.38,377.43 ; IC1.6@3009.05,397.11 3120.06,397.11 ; D3.2@3150,575.12 D3.2@3161.47,563.66 ; L7.2@3161.47,514.45 3199.43,476.48 3202.73,473.19 3196.14,473.19 3120.06,397.11 ; 3100.38,377.43 3120.06,397.11
  Top Layer w20: L7.2@3161.47,514.45 D3.2@3161.47,563.66
NetD4_1: D4.1 R21.1 | length 161.1
  Top Layer w10: D4.1@3344.48,985.99 3348.96,990.47 R21.1@3503.75,990.47
NetD5_1: D5.1 R11.1 | length 161.7
  Top Layer w10: D5.1@3344.48,931.92 3350.38,937.82 R11.1@3503.75,937.82
NetD7_1: D7.1 R1.1 | length 78.6
  Bottom Layer w5: R1.1@3620.99,1185.99 3697.91,1185.99 D7.1@3699.1,1184.8
NetD8_1: D8.1 R33.1 | length 76.3
  Bottom Layer w5: R33.1@3622.83,1119.84 D8.1@3699.1,1119.84
NetE1_1: E1.1 L6.1 | length 81.6
  Bottom Layer w5.78: L6.1@3451.65,1968.59 L6.1@3451.65,1970.56 ; L6.1@3457.56,1965.36 E1.1@3457.56,2036.44 ; E1.1@3457.56,2040 E1.1@3457.56,2036.44 ; E1.1@3461.12,2040 E1.1@3457.56,2036.44
NetF1_2: F1.2 J1.2 | length 233.1
  Top Layer w40: F1.2@4071.93,577.35 4169.54,577.35 J1.2@4261.75,485.14
  Top Layer w50: F1.2@4071.93,577.35 F1.2@4071.93,582.47
NetIC1_1: IC1.1 R12.2 | length 107.8
  Top Layer w5: R12.2@2928,243.62 2928,245.59 2957.41,275 2980.23,275 2995.81,290.58 2995.81,295.28 2999.21,298.69 IC1.1@3009.05,298.69
NetIC1_2: IC1.2 R17.1 | length 133.2
  Top Layer w5: R17.1@2965,243.62 2965,245.59 2984.41,265 3007.63,265 3032.3,289.67 3032.3,307.7 3027.91,312.09 3025.18,312.09 3018.9,318.37 IC1.2@3009.05,318.37
NetIC1_13: IC1.13 R18.1 R19.2 | length 135
  Top Layer w5: R19.2@2795.56,324.28 2875.2,324.28 2881.1,318.37 IC1.13@2890.94,318.37
  Top Layer w15: R19.2@2795.56,324.28 R18.1@2795.56,361.43
NetIC1_14: IC1.14 R14.2 R34.2 | length 98.5
  Top Layer w5: R34.2@2835.04,248.46 R14.2@2835.04,285.59 2837.01,285.59 2850.1,298.69 IC1.14@2890.94,298.69
NetJ2_2: J2.2 R27.1 | length 583.9
  Top Layer w10: v2(3877.5,1049.46) 3901.96,1025 J2.2@4395,1025
  Bottom Layer w10: R27.1@3824.68,1025 3826.65,1025 3846.66,1045.01 v2@3872.63,1045.01
NetJ4_1: J4.1 U9.5 | length 422.9
  Bottom Layer w10: J4.1@2480,1345.37 2480.98,1344.38 2499.17,1344.38 2551.43,1396.64 U9.5@2880.83,1396.64
NetJ4_2: J4.2 U9.7 | length 402.7
  Bottom Layer w10: J4.2@2480,1445.37 2480.98,1444.38 2499.17,1444.38 2501.61,1446.82 2879.83,1446.82 U9.7@2880.83,1447.82
NetJ4_3: J4.3 U9.8 | length 430.6
  Bottom Layer w10: J4.3@2480,1545.37 2480.98,1544.38 2499.17,1544.38 2570.14,1473.41 U9.8@2880.83,1473.41
NetJ4_4: J4.4 U9.10 | length 450.9
  Bottom Layer w10: J4.4@2480,1645.37 2480.98,1644.38 2499.17,1644.38 2618.96,1524.6 U9.10@2880.83,1524.6
NetJ5_1: J5.1 R31.2 | length 115.4
  Bottom Layer w5.78: R31.2@3553.43,1830.77 3591.12,1830.77 3645.36,1885 J5.1@3646.34,1885
NetL1_2: L1.2 R31.1 R32.1 | length 126.9
  Bottom Layer w5.78: L1.2@3457.56,1731.5 R32.1@3457.56,1771.71 3464.51,1778.66 3464.51,1788.51 3469.83,1788.51 3512.09,1830.77 R31.1@3514.05,1830.77
NetL3_2: L3.2 L4.1 | length 138.8
  Bottom Layer w10: L4.1@3688.86,1391.76 3688.86,1389.79 3699.61,1379.04 3814.4,1379.04 L3.2@3819.24,1374.17
NetR1_2: R1.2 U1.2 | length 197.1
  Bottom Layer w5: U1.2@3500.87,1341.61 3500.87,1253.04 3560.57,1193.33 3574.27,1193.33 R1.2@3581.62,1185.99
NetR2_1: R2.1 R4.1 U1.43 | length 743
  Bottom Layer w5: U1.43@3546.14,1449.88 3690.22,1449.88 3747.21,1506.87 3751.35,1506.87 3751.4,1506.82 4145.27,1506.82 4180.69,1471.4 4182.66,1471.4 4190,1464.06 R4.1@4190,1462.09 4220.08,1462.09 R2.1@4234.93,1462.09 4234.93,1462.62 R2.1@4242.27,1469.96
NetR3_1: R3.1 R5.1 U1.41 | length 774.8
  Bottom Layer w5: U1.41@3546.14,1481.37 3692.48,1481.37 3873.67,1662.56 R5.1@4190,1662.56 R3.1@4234.93,1662.56 4234.93,1663.09 R3.1@4242.27,1670.43
NetR6_1: R6.1 R8.1 U1.42 | length 734.6
  Bottom Layer w5: U1.42@3546.14,1465.63 3691.83,1465.63 3743.07,1516.87 3749.98,1516.87 3789.82,1556.71 4182.66,1556.71 4190,1564.06 R8.1@4190,1566.03 4227.59,1566.03 4231.26,1569.7 R6.1@4234.93,1566.03
NetR7_1: R7.1 R9.1 U1.40 | length 801.8
  Bottom Layer w5: U1.40@3546.14,1497.12 3693.39,1497.12 3953.35,1757.08 4182.66,1757.08 4190,1764.43 R9.1@4190,1766.39 4190.78,1765.61 R7.1@4234.93,1765.61
NetR10_1: R10.1 U2.2 | length 85
  Bottom Layer w5: U2.2@3433.4,926.01 R10.1@3433.4,1011.06
NetR13_1: R13.1 U4.4 | length 50
  Top Layer w10: U4.4@3773.66,262.31 3774.65,263.29 R13.1@3823.25,263.29
NetR15_2: R15.2 R16.2 U4.3 | length 133.5
  Top Layer w10: R15.2@3543.24,254.04 R16.2@3591.57,254.04 3595.71,258.18 3669.14,258.18 U4.3@3673.27,262.31
NetR22_2: R22.2 U9.6 | length 226.3
  Top Layer w10: v2(2799.95,1422.82) 2800.61,1422.15 2859.91,1422.15 2878.64,1403.42 R22.2@2878.64,1364.16
  Bottom Layer w10: v2(2799.95,1422.82) U9.6@2900.3,1422.82
NetR23_2: R23.2 U9.9 | length 173.2
  Top Layer w10: v2@2805,1499.8 2805.22,1499.58 2808.56,1499.58 2808.77,1499.8 2862.1,1499.8 2880.83,1518.53 R23.2@2880.83,1531.49
  Bottom Layer w10: v2@2805,1500.6 2805.8,1499.8 2880.03,1499.8 U9.9@2880.83,1499
  other v2: 2804.86,1498.05
NetR24_1: R24.1 R25.1 U9.12 U9.13 | length 206.8
  Bottom Layer w5: U9.12@2880.83,1575.78 2896.55,1575.78 2900.94,1580.17 2900.94,1603.76 2923.12,1625.94 R25.1@2923.12,1700
  Bottom Layer w10: R25.1@2923.12,1700 R24.1@2978.96,1700
NetR27_2: R27.2 R28.1 U1.4 | length 549.8
  Bottom Layer w5: U1.4@3469.37,1341.61 3469.37,1203.73 3641.82,1031.28 3731.13,1031.28 R28.1@3738.47,1023.94 ; R28.1@3738.47,1023.94 R28.1@3738.47,1021.97 R28.1@3738.47,1023.94 ; R28.1@3738.47,1023.94 3745.81,1031.28 R27.2@3776,1031.28 ; R27.2@3776,1031.28 3779.03,1031.28 R27.2@3785.31,1025 3782.28,1025 R27.2@3776,1031.28
NetR29_2: R29.2 U1.12 U9.27 | length 285.4
  Top Layer w5: v2(3170.5,1329.83) 3170.5,1365.1 R29.2@3172.6,1367.2 R29.2@3172.6,1365.23
  Bottom Layer w5: U9.27@3107.21,1319.87 3107.76,1320.42 3161.07,1320.42 v2(3170.5,1329.83) 3173.81,1329.83 3185.59,1341.61 U1.12@3343.39,1341.61
NetR30_2: R30.2 U1.22 U9.18 | length 270.3
  Top Layer w5: v2(3205.63,1555.63) 3205.63,1523.41 R30.2@3208.17,1520.87
  Bottom Layer w5: U9.18@3107.21,1550.19 3209.87,1550.19 v2@3210,1550.33 ; v2(3205.63,1555.63) v2@3210.16,1555.63 ; v2@3210.16,1550.19 v2@3210.16,1555.63 ; U1.22@3313.86,1512.87 3258.04,1512.87 3217.12,1553.79 3211.63,1553.79 3210.16,1555.26 v2@3210.16,1555.63
NetR33_2: R33.2 U1.3 | length 270.5
  Bottom Layer w5: U1.3@3485.12,1341.61 3485.12,1204.53 3562.46,1127.19 3576.12,1127.19 R33.2@3583.46,1119.84
NetU1_8: U1.8 U3.1 | length 401.2
  Bottom Layer w5: U3.1@3171.08,1039.93 3168.62,1042.39 3168.62,1089.04 3298.69,1219.11 3405.47,1325.88 3405.47,1340.7 U1.8@3406.38,1341.61
NetU1_9: U1.9 U3.14 | length 399.1
  Bottom Layer w5: U3.14@3145,1046.33 3142.54,1048.79 3142.54,1078.76 3389.69,1325.91 3389.69,1340.67 U1.9@3390.63,1341.61
NetU1_10: U1.10 U3.13 | length 400.7
  Bottom Layer w5: U3.13@3125.31,1046.33 3122.86,1048.79 3122.86,1074.82 3373.94,1325.91 3373.94,1340.67 U1.10@3374.88,1341.61
NetU1_11: U1.11 U3.12 | length 402.3
  Bottom Layer w5: U3.12@3105.63,1046.33 3103.17,1048.79 3103.17,1070.88 3277.03,1244.74 3359.13,1326.85 U1.11@3359.13,1341.61
NetU1_14: U1.14 U9.26 | length 223.8
  Bottom Layer w5: U9.26@3107.21,1345.46 3111.6,1349.85 3131.94,1349.85 3168.98,1386.89 U1.14@3313.86,1386.89
NetU1_15: U1.15 U9.25 | length 219.7
  Bottom Layer w5: U9.25@3107.21,1371.05 3111.6,1375.44 3133.25,1375.44 3160.44,1402.63 U1.15@3313.86,1402.63
NetU1_16: U1.16 U9.24 | length 217
  Bottom Layer w5: U9.24@3107.21,1396.64 3124.92,1396.64 3129.31,1401.03 3129.31,1403.41 3144.29,1418.38 U1.16@3313.86,1418.38
NetU1_17: U1.17 U9.22 | length 212.3
  Bottom Layer w5: U9.22@3107.21,1447.82 3124.92,1447.82 3138.62,1434.13 U1.17@3313.86,1434.13
NetU1_18: U1.18 U9.21 | length 216.4
  Bottom Layer w5: U9.21@3107.21,1473.41 3124.92,1473.41 3148.46,1449.88 U1.18@3313.86,1449.88
NetU1_19: U1.19 U9.20 | length 220.8
  Bottom Layer w5: U9.20@3107.21,1499 3124.92,1499 3158.65,1465.28 3243.5,1465.28 3243.85,1465.63 U1.19@3313.86,1465.63
NetU1_20: U1.20 U9.19 | length 230.8
  Bottom Layer w5: U9.19@3107.21,1524.6 3124.92,1524.6 3175.7,1473.82 3239.96,1473.82 3247.51,1481.37 U1.20@3313.86,1481.37
NetU1_23: U1.23 U9.17 | length 227.6
  Bottom Layer w5: U9.17@3107.21,1575.78 3171.25,1575.78 3172.6,1577.13 3214.53,1577.13 3233.69,1557.97 3233.69,1557.37 3262.45,1528.62 U1.23@3313.86,1528.62
NetU1_27: U1.27 U9.16 | length 332.7
  Bottom Layer w5: U9.16@3107.21,1601.37 3124.92,1601.37 3138.67,1587.62 3212.44,1587.62 3262.21,1637.39 3332.61,1637.39 3374.88,1595.12 U1.27@3374.88,1573.89
nRESET: P1.10 U1.24 | length 444.8
  Top Layer w5: P1.10@2967.57,1769.8 3038.71,1769.8 3251.31,1557.2 3257.2,1557.2 v2(3259.69,1554.71)
  Bottom Layer w5: v2(3259.69,1554.71) 3262.33,1554.71 3272.68,1544.37 U1.24@3318.96,1544.37
RX: P2.3 U1.28 | length 437.8
  Bottom Layer w5: P2.3@3125.56,1901.9 3135,1892.45 3135,1855.48 3390.63,1599.85 U1.28@3390.63,1573.89
SDWIO: P1.2 U1.26 | length 663.6
  Top Layer w5: P1.2@2967.57,1969.8 2979.64,1957.73 3037.05,1957.73 3054.69,1940.09 3054.69,1777.98 3216.77,1615.89 v2(3304.81,1615.89)
  Bottom Layer w5: v2(3304.81,1615.89) 3307.3,1618.38 3337.48,1618.38 3359.13,1596.72 U1.26@3359.13,1576.27
SWDCLK: P1.4 U1.25 | length 596.2
  Top Layer w5: P1.4@2967.57,1919.8 2968.39,1920.61 3024.17,1920.61 3042.88,1901.9 3042.88,1777.71 3230.35,1590.24 3304.32,1590.24 v2(3306.81,1587.75)
  Bottom Layer w5: v2(3306.81,1587.75) 3308.34,1586.22 U1.25@3341.23,1586.22 ; U1.25@3343.39,1573.89 U1.25@3343.39,1584.83
SWO: P1.6 U1.21 | length 767.9
  Top Layer w5: P1.6@2930.76,1867.22 2924.64,1867.22 2905.15,1847.73 2905.15,1752.12 2925.15,1732.12 3062.24,1732.12 3233.13,1561.24 v2(3233.13,1490.32) ; P1.6@2955.51,1857.73 P1.6@2967.57,1869.8 ; P1.6@2967.57,1880.68 2979.64,1868.61 3022.62,1868.61
  Bottom Layer w5: v2(3233.13,1490.32) 3236.64,1490.32 3243.44,1497.12 U1.21@3313.86,1497.12
TX: P2.2 U1.29 | length 403.8
  Bottom Layer w5: P2.2@3225.56,1901.9 3225.56,1777.6 3395.59,1607.57 3397.05,1607.57 3406.38,1598.24 U1.29@3406.38,1573.89
V3P3OUT: C45.2 R24.2 R29.1 R30.1 U9.15 | length 415.3
  Top Layer w10: v2(3152.13,1609.12) 3152.13,1608.11 3168.59,1591.65 3168.59,1521.07 R30.1@3168.8,1520.87 3169.72,1520.87 3174.56,1516.02 3170.7,1516.02 3170.7,1408.47 R29.1@3172.6,1406.57
  Bottom Layer w10: R24.2@3018.33,1700 C45.2@3070.44,1700 3070.44,1671.02 3098.47,1642.99 3098.47,1628.85 3107.21,1628.85 U9.15@3108.15,1627.9 ; U9.15@3107.21,1626.96 3137.23,1626.96 3143.09,1621.1 v2(3152.13,1609.12)
XC1: C12.2 U1.34 X2.1 | length 346.8
  Top Layer w5: v2(3627.86,1658.42) 3676.29,1658.42 3704.41,1686.54 X2.1@3704.41,1687.52
  Top Layer w10: X2.1@3704.41,1687.52 C12.2@3704.41,1748.24
  Bottom Layer w5: U1.34@3485.12,1573.89 3485.12,1599.91 3543.09,1657.89 3631.18,1657.89 v2@3631.71,1658.42
XC2: C11.2 U1.35 X2.3 | length 261.9
  Top Layer w10: v2(3597.21,1633.5) 3597.21,1631.45 3607.74,1620.92 3640.59,1620.92 3644.28,1624.61 3656.26,1624.61 X2.3@3665.04,1633.39 ; C11.2@3663.9,1586.13 3663.9,1589.84 3665.04,1590.98 X2.3@3665.04,1633.39 ; X2.3@3665.04,1633.39 X2.3@3665.04,1634.37 X2.3@3665.04,1633.39
  Bottom Layer w5: U1.35@3500.87,1573.89 3500.87,1587.88 3503.08,1590.09 3544.01,1631.01 v2@3601.85,1631.01
pads on no net: D6.2 E1.2 J1.3 J1.4 J4.MH1 P1.8 U1.6 U1.7 U1.39 U1.44 U3.4 U3.9 U3.10 U3.11 U9.23

## Polygon pours and split planes (outlines as drawn)
GND on Bottom Layer "NONET_L-01_P-001" (solid, pour order 1): 4500,2250 4500,0 2250,0 2250,2250
GND on Top Layer "NONET_L-01_P-001" (solid, pour order 0): 4500,2250 2250,2250 2250,0 4500,0
GND on Layer 2 (split plane): 4479.9,20.1 2270.1,20.1 2270.1,2229.9 4479.9,2229.9
3V3 on Layer 1 (split plane): 4479.9,20.1 2270.1,20.1 2270.1,2229.9 4479.9,2229.9

## Keep-outs
Keep-Out Layer:
  region: 4500,2005 4500,2250 2250,2250 2250,2005

## Silkscreen, mask and mechanical layers (free items; w line width, h text height)
Top Overlay:
  text "3V3" at 3116.06,975.08 h36
  text "5V0" at 3117.61,919.58 h36
  text "12V0" at 3117.61,856.04 h36
  text "GND" at 4089.57,634.73 h40 r90
  text "7V4" at 4087,408 h40 r90
Bottom Overlay:
  text "Airbrake  Motor / Controller Rev:1.1" at 4110,35 h60
Top Solder:
  rectangle: 3642.4,1613.86 3716.22,1712.59
Bottom Solder:
  rectangle: 2857.29,1286.6 2915.25,1651.67
  rectangle: 3071.37,1289.39 3138.46,1651.67
  rectangle: 3072.7,957.27 3186.87,1057.25
  rectangle: 3519.59,1359.72 3566.65,1556.3
  rectangle: 3296.54,1348.62 3344.29,1536.61
PCB Outline:
  lines w10: 2250,0 2250,0 ; 2250,0 4500,0 4500,2250 ; 2250,0 2250,2250 4500,2250 ; 4500,2250 4500,2250
Outline:
  lines w47.24: 2250,0 2250,2250 2250,0 ; 2250,0 2250,0

## Text inside footprints (layer, text, board x,y; h text height)
R22: Mechanical 7 "Default Padstyle: RX47p46Y125p98D0T" at 3430.43,1697.15 h50 r180; Mechanical 7 "Alternate 1 Padstyle: OX60Y90D30P" at 3405.43,1797.15 h50 r180; Mechanical 7 "Alternate 2 Padstyle: OX90Y60D30P" at 3405.43,1897.15 h50 r180; Mechanical 7 "0.126in/3.2mm" at 2748.91,1376.66 h25 r180; Mechanical 7 "0.248in/6.3mm" at 3074.18,1181.17 h25 r180; Mechanical 7 "0.033in/0.85mm" at 2973.14,1572.15 h25 r180
R23: Mechanical 7 "Default Padstyle: RX47p46Y125p98D0T" at 3432.61,1890.07 h50 r180; Mechanical 7 "Alternate 1 Padstyle: OX60Y90D30P" at 3407.61,1990.07 h50 r180; Mechanical 7 "Alternate 2 Padstyle: OX90Y60D30P" at 3407.61,2090.07 h50 r180; Mechanical 7 "0.126in/3.2mm" at 2751.1,1569.58 h25 r180; Mechanical 7 "0.248in/6.3mm" at 3076.36,1374.08 h25 r180; Mechanical 7 "0.033in/0.85mm" at 2975.33,1765.07 h25 r180